# Altium PCB PCB2.PcbDoc
Units mil, origin at the board's own origin, x right, y up, seen from the top; angles counter-clockwise.
Board outline 4346 x 3642 mil, 2 copper layers (Top Layer, Bottom Layer); 40 components, 39 nets, 320 pads, 20 vias.
Unrouted connection lines stored in the file: 1.
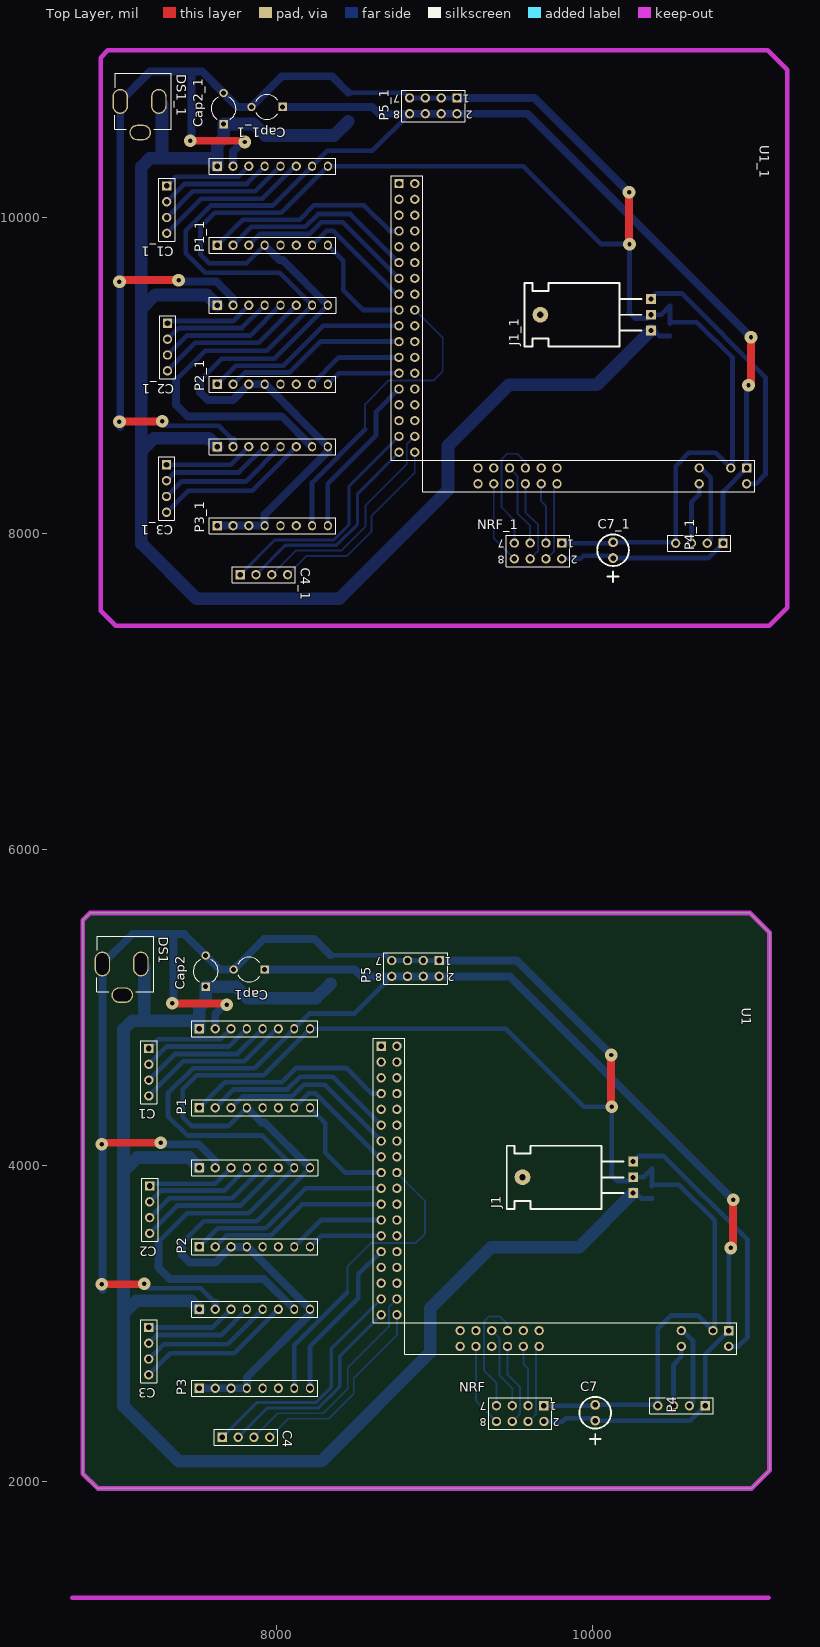
[diagram p0: Top Layer view]
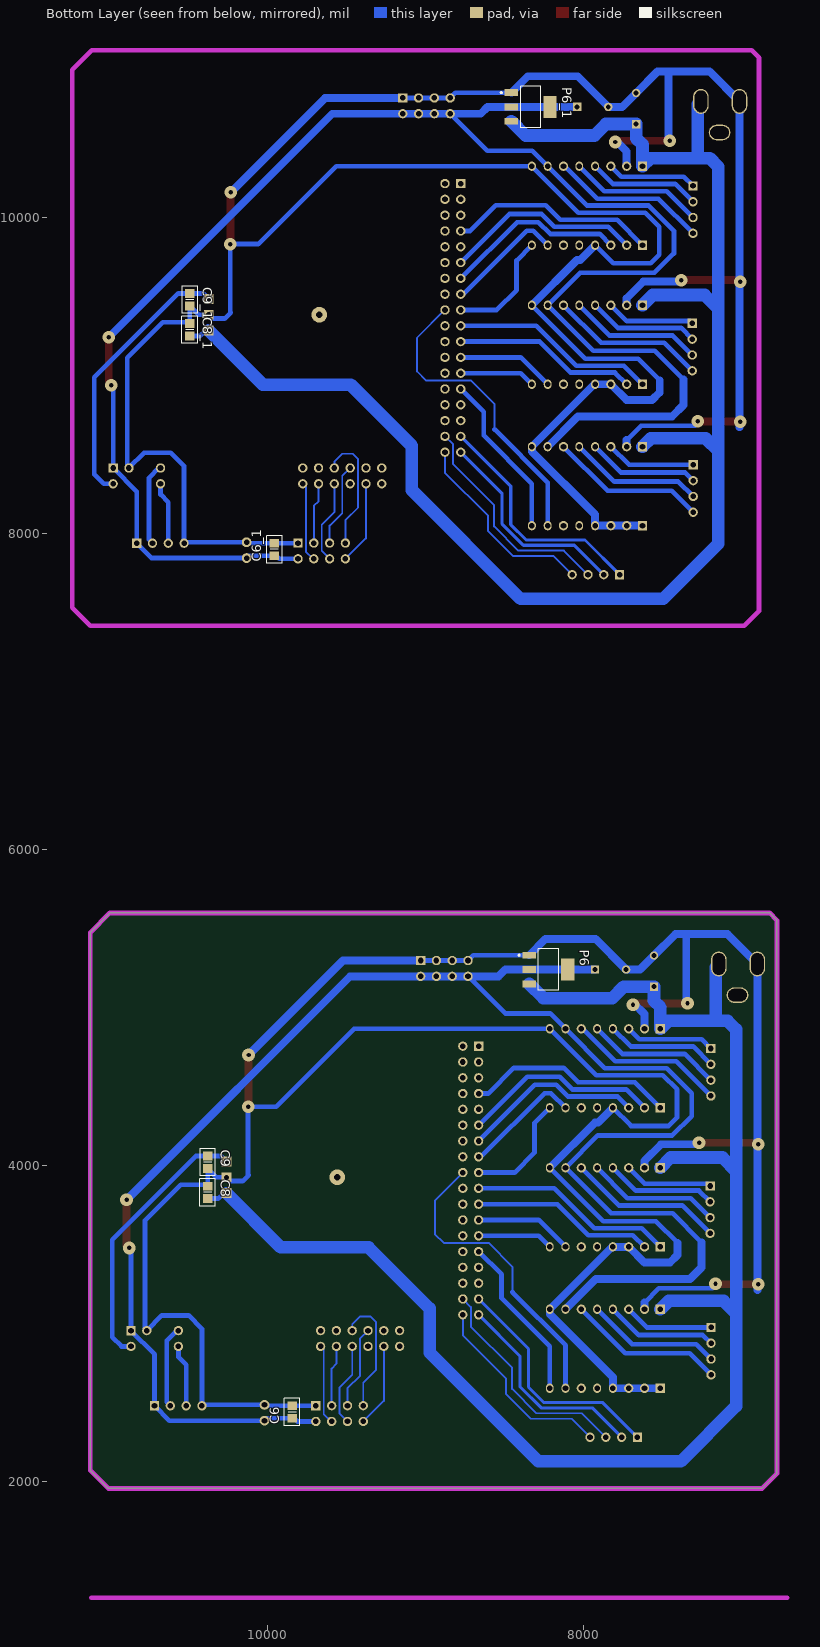
[diagram p1: Bottom Layer view, seen from below]

## Layer stack, top to bottom
Top Solder: solder mask 0.4, Solder Resist, Dk 3.5
Top Layer: signal copper 1.4
Dielectric 1: dielectric 12.6, FR-4, Dk 4.8
Bottom Layer: signal copper 1.4
Bottom Solder: solder mask 0.4, Solder Resist, Dk 3.5

## Board outline
6777,2050 6777,5552 6823,5598 10999,5598 11123,5474 11123,2070 11009,1956 6871,1956

## Design rules (kind name [scope] priority, off if disabled: settings)
Clearance [All] p1: gap=10
PolygonConnect [All] p1: connectstyle=Relief reliefconductorwidth=10 reliefentries=4 polygonreliefangle="90 Angle" airgapwidth=10
RoutingVias [All] p1: holewidth=28 width=50 viastyle="Through Hole" minholewidth=28 minwidth=50 maxholewidth=28 maxwidth=50
SolderMaskExpansion [All] p1: expansion=4
Width [All] p1: maxlimit=100 minlimit=10 preferedwidth=20
30 further rules are at their usual default settings.

## Classes and differential pairs
component class Sheet2: C1 C2 C3 C4 C6 C7 C8 C9 Cap1 Cap2 DS1 J1 NRF P1 P2 P3 P4 P5 P6 U1

## Components (designator, comment, footprint, x,y, rotation, side; value= is the part's Value field where it differs from the comment)
C1 "Header 4" HDR1X4 7195,4740 r270 top
C1_1 "Header 4" HDR1X4 7308,10199 r270 top (schematic designator C1)
C2 "Header 4" HDR1X4 7200,3870 r270 top
C2_1 "Header 4" HDR1X4 7313,9329 r270 top (schematic designator C2)
C3 "Header 4" HDR1X4 7194,2975 r270 top
C3_1 "Header 4" HDR1X4 7307,8434 r270 top (schematic designator C3)
C4 "Header 4" HDR1X4 7660,2280 r0 top
C4_1 "Header 4" HDR1X4 7773,7739 r0 top (schematic designator C4)
C6 "Cap" 0805_C 9845,2439.37 r90 bottom
C6_1 "Cap" 0805_C 9958,7898.37 r90 bottom (schematic designator C6)
C7 "Cap" 10UF 10020,2385 r90 top
C7_1 "Cap" 10UF 10133,7844 r90 top (schematic designator C7)
C8 "Cap" 0805_C 10380,3830 r270 bottom
C8_1 "Cap" 0805_C 10493,9289 r270 bottom (schematic designator C8)
C9 "Cap" 0805_C 10380,4020 r270 bottom
C9_1 "Cap" 0805_C 10493,9479 r270 bottom (schematic designator C9)
Cap1 "Cap2" CAPR5-4X5 7830,5240 r180 top
Cap1_1 "Cap2" CAPR5-4X5 7943,10699 r180 top (schematic designator Cap1)
Cap2 "Cap2" CAPR5-4X5 7555,5230 r90 top
Cap2_1 "Cap2" CAPR5-4X5 7668,10689 r90 top (schematic designator Cap2)
DS1 "BATTERY" 9V 7145.28,5275 r270 top
DS1_1 "BATTERY" 9V 7258.28,10734 r270 top (schematic designator DS1)
J1 "7805" TO-220 10260,3825 r90 top
J1_1 "7805" TO-220 10373,9284 r90 top (schematic designator J1)
NRF "Header 4X2" HDR2X4#1 9816,3220 r90 top
NRF_1 "Header 4X2" HDR2X4#1 9929,8679 r90 top (schematic designator NRF)
P1 "Header 8X2A" PCBComponent_1#1 11149,4151 r90 top
P1_1 "Header 8X2A" PCBComponent_1#1 11262,9610 r90 top (schematic designator P1)
P2 "Header 8X2A" PCBComponent_1#1 11149,3271 r90 top
P2_1 "Header 8X2A" PCBComponent_1#1 11262,8730 r90 top (schematic designator P2)
P3 "Header 8X2A" PCBComponent_1#1 11149,2376 r90 top
P3_1 "Header 8X2A" PCBComponent_1#1 11262,7835 r90 top (schematic designator P3)
P4 "Header 4" HDR1X4 10716,2479 r180 top
P4_1 "Header 4" HDR1X4 10829,7938 r180 top (schematic designator P4)
P5 "Header 4X2" HDR2X4#2 9032,5297 r180 top
P5_1 "Header 4X2" HDR2X4#2 9145,10756 r180 top (schematic designator P5)
P6 "Header 4" SOT-223 8222.5,5240 r270 bottom
P6_1 "Header 4" SOT-223 8335.5,10699 r270 bottom (schematic designator P6)
U1 "ZET6_3R" PCBComponent_1#2 8600,4975 r270 top
U1_1 "ZET6_3R" PCBComponent_1#2 8713,10434 r270 top (schematic designator U1)

## Footprints (in the part's own frame and the unit in brackets; to place one, negate y for a bottom-side part, rotate by r counter-clockwise, add the part's x,y. Pads: shape width x height; smd on the part's side, far side on the other; paste and mask are expansions set on the pad)
9V [mm]
  oval 4x2.5 hole 2 slot 3.5 at 0 deg: 1(0,-6.207) 2(0,-0.007)
  oval 2.5x3.5 hole 2 slot 3 at 90 deg: 3(5,-3.007)
  silkscreen extent -4.5,-7.11 4.5,2.03, body extent -4.38,-13.84 5.14,0.76, height 10.92
10UF [mil]
  round 62 hole 35.43: 1(0,0) 2(100,0)
  silkscreen extent -152,-100 150,100
0805_C [mm] "Chip Res or Cap, Body 2.0x1.2mm, IPC Low Density"
  rect 1.4x1.5 smd: 1(-1,0) 2(1,0)
  silkscreen extent -2.2,-1.25 2.2,1.25, body extent -1.07,-0.7 1.07,0.7, height 0.7
CAPR5-4X5 [mm] "Capacitor; 2 Leads"
  rect 1.35x1.35 hole 0.8: 1(-2.5,0)
  round 1.35 hole 0.8: 2(2.5,0)
  silkscreen extent -1.69,-2 1.82,2
HDR1X4 [mm] "Connector; Header; 4 Position"
  rect 1.5x1.5 hole 0.9: 1(0,0)
  round 1.5 hole 0.9: 2(2.54,0) 3(5.08,0) 4(7.62,0)
  silkscreen extent -1.27,-1.27 8.89,1.27
HDR2X4#1 [mm] "Connector; Header; 4x2 Position"
  rect 1.5x1.5 hole 0.9: 1(-18.796,3.073)
  round 1.5 hole 0.9: 2(-21.336,3.073) 3(-18.796,5.613) 4(-21.336,5.613) 5(-18.796,8.153) 6(-21.336,8.153) 7(-18.796,10.693) 8(-21.336,10.693)
  silkscreen extent -22.61,1.8 -17.53,11.96, body extent -45.82,1.54 -17.37,16.9, height 0.05
HDR2X4#2 [mm] "Connector; Header; 4x2 Position"
  rect 1.5x1.5 hole 0.9: 1(0,0)
  round 1.5 hole 0.9: 2(0,2.54) 3(2.54,0) 4(2.54,2.54) 5(5.08,0) 6(5.08,2.54) 7(7.62,0) 8(7.62,2.54)
  silkscreen extent -1.27,-1.27 8.89,3.81
PCBComponent_1#1 [mm]
  rect 1.5x1.5 hole 0.9: 1(5.436,92.304) 9(18.136,92.304)
  round 1.5 hole 0.9: 2(5.436,89.764) 3(5.436,87.224) 6(5.436,79.604) 10(18.136,89.764) 11(18.136,87.224) 14(18.136,79.604)
  oval 1.5x1.27 hole 0.9: 4(5.436,84.684) 5(5.436,82.144) 7(5.436,77.064) 8(5.436,74.524) 12(18.136,84.684) 13(18.136,82.144) 15(18.136,77.064) 16(18.136,74.524)
  silkscreen extent 4.17,73.25 19.41,93.57, body extent 4.17,73.25 19.28,93.57, height 0.7
PCBComponent_1#2 [mm]
  round 1.5 hole 0.9: 43(5.588,4.191) 45(8.128,4.191) 46(8.128,1.651) 47(10.668,4.191) 48(10.668,1.651) 49(13.208,4.191) 50(13.208,1.651) 51(15.748,4.191) 52(15.748,1.651) 53(18.288,4.191) 54(18.288,1.651) 55(20.828,4.191) 56(20.828,1.651) 57(23.368,4.191) 58(23.368,1.651) 59(25.908,4.191) 60(25.908,1.651) 61(28.448,4.191) 62(28.448,1.651) 63(30.988,4.191) 64(30.988,1.651) 65(33.528,4.191) 66(33.528,1.651) 67(36.068,4.191) 68(36.068,1.651) 69(38.608,4.191) 70(38.608,1.651) 71(41.148,4.191) 72(41.148,1.651) 73(43.688,4.191) 74(43.688,1.651) 75(46.228,4.191) 76(46.228,1.651) 77(48.768,4.191) 78(48.768,1.651) 85(53.848,14.351) 86(51.308,14.351) 87(53.848,16.891) 88(51.308,16.891) 89(53.848,19.431) 90(51.308,19.431) 91(53.848,21.971) 92(51.308,21.971) 93(53.848,24.511) 94(51.308,24.511) 95(53.848,27.051) 96(51.308,27.051) 113(53.848,49.911) 114(51.308,49.911) 118(51.308,54.991) 119(53.848,57.531)
  rect 1.5x1.5 hole 0.9: 44(5.588,1.651) 120(51.308,57.531)
  silkscreen extent 4.32,0.38 55.12,58.8
SOT-223 [mm] "SOT-223/SC-73; 4 Leads; Body 6.7 x 7.3 mm, inc. leads (LxW max)"
  rect 1.1x2.15 smd: 1(-2.3,-3.1) 2(0,-3.1) 3(2.3,-3.1)
  rect 3.5x2.15 smd: 4(0,3.1)
  silkscreen extent -3.35,-4.85 3.35,1.63, body extent -3.25,-3.58 3.25,3.38, height 1.65
TO-220 [mil]
  round 100 hole 40: 0(100,700)
  rect 62x62 hole 32: 1(0,0) 2(100,0) 3(200,0)
  silkscreen extent -100,60 300,800, body extent -99,-3 295,773, height 177

## Part data
C1 C1_1 C2 C2_1 C3 C3_1 C4 C4_1 P4 P4_1 P6 P6_1: "Header, 4-Pin"
C6 C6_1 C7 C7_1 C8 C8_1 C9 C9_1 Cap1 Cap1_1 Cap2 Cap2_1: "Capacitor"
J1 J1_1: library part CON3, "Connector"
NRF NRF_1 P5 P5_1: "Header, 4-Pin, Dual row"
P1 P1_1 P2 P2_1 P3 P3_1: "Header, 8-Pin, Dual row"

## Via types
v1: diameter 80, hole 28, Top Layer to Bottom Layer, 20 vias

## Nets (pads, with @x,y where several pads share a name; then routed paths per layer and width w, separated by ;. In a path a pad name is that pad's centre, name@x,y a point inside that pad or via, vN(x,y) a via of type N, cw(c..) or ccw(c..) an arc to the next point about the centre after c; other vN are vias at no path point)
3V3: C6.1 C7.1 Cap1.1 NRF.2 P1.15 P2.15 P3.15 P4.1 P5.2 P5.4 P5.6 P5.8 P6.2 P6.4 U1.120 | length 10999.1
  Top Layer w50: v1(10877,3478) 10893,3494 v1(10893,3782)
  Bottom Layer w10: C6.1@9833,2400 C6.1
  Bottom Layer w30: 7255,3514 7438,3697 7827,3697 P2.15 7910,4190 7439,4190 7316,4313 7316,4457 7475,4616 7866,4616 P1.15 8212,4962 8497,4962 P5.8 ; NRF.2 9813,2380 C6.1@9833,2400 ; C6.1 10005,2400 C7.1 10622,2385 P4.1 10716,2806 U1.120 v1@10865,3477
  Bottom Layer w50: 7255,3514 7255,3354 7327,3282 7923,3282 P3.15 ; Cap1.1 P6.4 P6.2 8496,5240 8539,5197 P5.8 P5.6 P5.4 P5.2 9478,5197 v1(10893,3782)
5V: C9.1 J1.3 U1.119 | length 1716.4
  Bottom Layer w30: J1.3 10294.37,4059.37 C9.1 10453.63,4059.37 10984,3529 10984,2914 10925,2855 U1.119
12V: C8.2 Cap2.1 DS1.2 J1.1 P1.9 P2.9 P3.9 P6.3 | length 9865.2
  Bottom Layer w30: J1.1 10279,3825 10313.37,3790.63 C8.2
  Bottom Layer w80: DS1.2 7165,5255 7165,4915 ; P3.9 7462,3143 7115,3143 7035,3063 ; P2.9 7450,4050 7122,4050 7035,3963 ; P6.3 8254.1,5059 7819,5059 7746.43,5131.57 Cap2.1 7555,5042 7515,5002 P1.9 7465,4915 7165,4915 ; J1.1 9917,3482 9361,3482 8975,3096 8975,2816 8286,2127 7385,2127 7035,2477 7035,3063 ; 7035,3063 7035,3963 ; 7035,3963 7035,4861 7089,4915 7165,4915
DIRX: P1.8 U1.60 | length 730
  Bottom Layer w30: P1.8 8312,4268 8312,4080 8437,3955 U1.60
DIRY: P2.8 U1.68 | length 479
  Bottom Layer w30: P2.8 8285,3555 U1.68
DIRZ: P3.8 U1.70 | length 1051.4
  Bottom Layer w30: P3.8 8215,2856 8520,3161 8520,3310 U1.70
ENDPOSX: C4.2 U1.78 | length 1339.1
  Bottom Layer w20: C4.2 7946,2466 8269,2466 8403,2600 8403,2793 U1.78
ENDPOSY: C4.4 U1.77 | length 1259
  Bottom Layer w12: C4.4 8077,2397 8334,2397 8492,2555 8492,2652 8765,2925 U1.77
GND: C6.2 C7.2 C8.1 C9.2 Cap1.2 Cap2.2 DS1.1 J1.2 NRF.1 P1.4 P1.10 P1.16 P2.3 P2.4 P2.10 P2.16 P3.1 P3.2 P3.3 P3.4 P3.10 P3.16 P4.4 P5.1 P5.3 P5.5 P5.7 P6.1 U1.118 | length 18607.3
  Top Layer w50: v1(6896,3248) 7163,3248 v1(7166,3251) ; v1(6896,4134) 6906,4144 v1(7270,4144) ; v1(7343,5026) 7680,5026 v1(7688,5018) ; v1(10121,4699) 10121,4375 v1(10124,4372)
  Bottom Layer w30: v1@7169,3237 7183,3223 7524,3223 7615,3132 ; 7406,3510 7543,3647 7877,3647 P2.16 ; Cap1.2 Cap1.2@7731.57,5240.57 ; P1.4 7700,4250 7463,4250 7409,4304 7409,4481 7499,4571 7921,4571 P1.16 9453,4865 9946,4372 v1(10124,4372) 10124,3942 10121,3939 10159,3901 10236,3901 J1.2 10324.37,3925 C9.2 C8.1 ; P6.1 8698.45,5330.55 P5.7 P5.5 P5.3 P5.1 ; NRF.1 9696.26,2478.74 C6.2 10013.74,2478.74 C7.2 10410,2485 P4.4 10416,2967 10500,3051 10669,3051 U1.118
  Bottom Layer w50: v1@6900.91,3212.91 DS1.1 7089.91,5464 7351,5464 ; v1@7280,4134 7510,4134 7615,4029 P2.10 ; v1@7351,5026 7351,5464 ; 7406,3510 7406,3434 7455,3385 7615,3385 P2.3 P2.4 7820,3485 P3.16 8215,3060 7815,2660 P3.4 P3.1 ; P3.10 7615,3132 ; P1.10 7615,4958 v1@7683,5026 ; Cap1.2 7643.43,5240 Cap2.2 7419.43,5464 7351,5464 ; Cap1.2@7731.57,5240.57 7925,5434 8241.1,5434 P6.1 ; P1.4 7909,4271 7929,4271 P2.16 ; P5.1 9523,5297 v1(10121,4699)
NetC1_1: C1.1 P1.11 | length 571.8
  Bottom Layer w30: C1.1 7253,4798 7648,4798 P1.11
NetC1_2: C1.2 P1.12 | length 713.2
  Bottom Layer w30: C1.2 7308,4753 7703,4753 P1.12
NetC1_3: C1.3 P1.13 | length 854.6
  Bottom Layer w30: C1.3 7361,4706 7756,4706 P1.13
NetC1_4: C1.4 P1.14 | length 996
  Bottom Layer w30: C1.4 7414,4659 7800,4659 8006,4865 P1.14
NetC2_1: C2.1 P2.11 | length 562.6
  Bottom Layer w30: C2.1 7215,3885 7615,3885 P2.11
NetC2_2: C2.2 P2.12 | length 704.1
  Bottom Layer w30: C2.2 7271,3841 7671,3841 P2.12
NetC2_3: C2.3 P2.13 | length 845.5
  Bottom Layer w30: C2.3 7323,3793 7723,3793 P2.13
NetC2_4: C2.4 P2.14 | length 986.9
  Bottom Layer w30: C2.4 7377,3747 7777,3747 P2.14
NetC3_1: C3.1 P3.11 | length 568.6
  Bottom Layer w30: C3.1 7600,2975 P3.11
NetC3_2: C3.2 P3.12 | length 710.1
  Bottom Layer w30: C3.2 7246,2927 7652,2927 P3.12
NetC3_3: C3.3 P3.13 | length 851.5
  Bottom Layer w30: C3.3 7288,2869 7694,2869 P3.13
NetC3_4: C3.4 P3.14 | length 992.9
  Bottom Layer w30: C3.4 7330,2811 7736,2811 P3.14
NRF_CE: NRF.3 U1.93 | length 387.4
  Bottom Layer w12: U1.93 9565,2745 9595,2715 NRF.3
NRF_CSN: NRF.4 U1.95 | length 506.9
  Bottom Layer w12: NRF.4 9600,2380 9645,2425 9645,2835 U1.95
NRF_IRQ: NRF.8 U1.87 | length 528.8
  Bottom Layer w12: U1.87 9265,2510 NRF.8
NRF_MISO: NRF.7 U1.92 | length 788.3
  Bottom Layer w12: NRF.7 9395,2625 9315,2705 9315,3010 9350,3045 9415,3045 9465,2995 U1.92
NRF_MOSI: NRF.6 U1.91 | length 528.8
  Bottom Layer w12: U1.91 9465,2675 9545,2595 9545,2430 NRF.6
NRF_SCK: NRF.5 U1.90 | length 528.8
  Bottom Layer w12: U1.90 9415,2905 9415,2670 9495,2590 NRF.5
RX: P4.2 U1.114 | length 521.2
  Bottom Layer w12: U1.114 U1.114@10575,2955
  Bottom Layer w30: U1.114@10575,2955 10638,2892 10638,2501 P4.2
STARTPOSX: C4.1 U1.76 | length 1509.2
  Bottom Layer w20: C4.1 7879,2499 8251,2499 8349,2597 8349,2839 U1.76
STARTPOSY: C4.3 U1.75 | length 1418.6
  Bottom Layer w12: C4.3 8012,2432 8300,2432 8453.5,2585.5 8453.5,2718.5 8714,2979 8714,3104 U1.75
STEPX: P1.7 U1.58 | length 754.6
  Bottom Layer w30: P1.7 8207,4457 8248,4457 8650,4055 U1.58
STEPY: P2.7 U1.66 | length 620.4
  Bottom Layer w30: P2.7 8285,3655 U1.66
STEPZ: P3.7 U1.59 | length 1947.2
  Bottom Layer w12: 8451,3199 8451,3359 8601.47,3509.47 8885.47,3509.47 8942,3566 8942,3778 U1.59
  Bottom Layer w30: P3.7 8115,2863 8451,3199
TX: P4.3 U1.113 | length 396.3
  Bottom Layer w30: P4.3 10516,2739 10565,2788 U1.113
X_EN: P1.1 U1.50 | length 1321.5
  Bottom Layer w30: P1.1 7676,4526 8036,4526 8127,4617 8443,4617 8605,4455 U1.50
XSET0: P1.2 U1.54 | length 1258.8
  Bottom Layer w30: P1.2 7731,4481 8072,4481 8153,4562 8358,4562 U1.54
XSET1: P1.3 U1.56 | length 1157.9
  Bottom Layer w30: P1.3 7786,4436 8099,4436 8174,4511 8309,4511 U1.56
Y_EN: P2.1 U1.62 | length 1303.3
  Bottom Layer w30: P2.1 7632,3602 7934,3602 8187,3855 U1.62
YSET0: P2.2 U1.64 | length 1161.8
  Bottom Layer w30: P2.2 7689,3559 7970,3559 8166,3755 U1.64
pads on no net: C1_1.1 C1_1.2 C1_1.3 C1_1.4 C2_1.1 C2_1.2 C2_1.3 C2_1.4 C3_1.1 C3_1.2 C3_1.3 C3_1.4 C4_1.1 C4_1.2 C4_1.3 C4_1.4 C6_1.1 C6_1.2 C7_1.1 C7_1.2 C8_1.1 C8_1.2 C9_1.1 C9_1.2 Cap1_1.1 Cap1_1.2 Cap2_1.1 Cap2_1.2 DS1.3 DS1_1.1 DS1_1.2 DS1_1.3 J1.0 J1_1.0 J1_1.1 J1_1.2 J1_1.3 NRF_1.1 NRF_1.2 NRF_1.3 NRF_1.4 NRF_1.5 NRF_1.6 NRF_1.7 NRF_1.8 P1.5 P1.6 P1_1.1 P1_1.2 P1_1.3 P1_1.4 P1_1.5 P1_1.6 P1_1.7 P1_1.8 P1_1.9 P1_1.10 P1_1.11 P1_1.12 P1_1.13 P1_1.14 P1_1.15 P1_1.16 P2.5 P2.6 P2_1.1 P2_1.2 P2_1.3 P2_1.4 P2_1.5 P2_1.6 P2_1.7 P2_1.8 P2_1.9 P2_1.10 P2_1.11 P2_1.12 P2_1.13 P2_1.14 P2_1.15 P2_1.16 P3.5 P3.6 P3_1.1 P3_1.2 P3_1.3 P3_1.4 P3_1.5 P3_1.6 P3_1.7 P3_1.8 P3_1.9 P3_1.10 P3_1.11 P3_1.12 P3_1.13 P3_1.14 P3_1.15 P3_1.16 P4_1.1 P4_1.2 P4_1.3 P4_1.4 P5_1.1 P5_1.2 P5_1.3 P5_1.4 P5_1.5 P5_1.6 P5_1.7 P5_1.8 P6_1.1 P6_1.2 P6_1.3 P6_1.4 U1.43 U1.44 U1.45 U1.46 U1.47 U1.48 U1.49 U1.51 U1.52 U1.53 U1.55 U1.57 U1.61 U1.63 U1.65 U1.67 U1.69 U1.71 U1.72 U1.73 U1.74 U1.85 U1.86 U1.88 U1.89 U1.94 U1.96 U1_1.43 U1_1.44 U1_1.45 U1_1.46 U1_1.47 U1_1.48 U1_1.49 U1_1.50 U1_1.51 U1_1.52 U1_1.53 U1_1.54 U1_1.55 U1_1.56 U1_1.57 U1_1.58 U1_1.59 U1_1.60 U1_1.61 U1_1.62 U1_1.63 U1_1.64 U1_1.65 U1_1.66 U1_1.67 U1_1.68 U1_1.69 U1_1.70 U1_1.71 U1_1.72 U1_1.73 U1_1.74 U1_1.75 U1_1.76 U1_1.77 U1_1.78 U1_1.85 U1_1.86 U1_1.87 U1_1.88 U1_1.89 U1_1.90 U1_1.91 U1_1.92 U1_1.93 U1_1.94 U1_1.95 U1_1.96 U1_1.113 U1_1.114 U1_1.118 U1_1.119 U1_1.120
copper on no net: | length 74383.4
  Top Layer w50: v1(7009,8707) 7276,8707 v1(7279,8710) ; v1(7009,9593) 7019,9603 v1(7383,9603) ; v1(7456,10485) 7793,10485 v1(7801,10477) ; v1(10234,10158) 10234,9834 v1(10237,9831) ; v1(10990,8937) 11006,8953 v1(11006,9241)
  Bottom Layer w10: 9946,7859 9958,7859
  Bottom Layer w12: 7973,7739 8125,7891 8413,7891 8566.5,8044.5 8566.5,8177.5 8827,8438 8827,8563 8878,8614 ; 8073,7739 8190,7856 8447,7856 8605,8014 8605,8111 8878,8384 8878,8514 ; 8564,8658 8564,8818 8714.47,8968.47 8998.47,8968.47 9055,9025 9055,9237 8878,9414 ; 9378,8314 9378,7969 9508,7839 ; 9478,8414 9528,8364 9528,8129 9608,8049 9608,7939 ; 9508,7939 9508,8084 9428,8164 9428,8469 9463,8504 9528,8504 9578,8454 9578,8414 ; 9578,8314 9578,8134 9658,8054 9658,7889 9608,7839 ; 9678,8314 9678,8204 9708,8174 9708,7939 ; 9708,7839 9713,7839 9758,7884 9758,8294 9778,8314 ; 10678,8414 10688,8414
  Bottom Layer w20: 7773,7739 7992,7958 8364,7958 8462,8056 8462,8298 8778,8614 ; 7873,7739 8059,7925 8382,7925 8516,8059 8516,8252 8778,8514
  Bottom Layer w30: v1@7282,8696 7296,8682 7637,8682 7728,8591 ; 7307,8134 7443,8270 7849,8270 8128,8549 ; 7307,8234 7401,8328 7807,8328 8028,8549 ; 7307,8334 7359,8386 7765,8386 7928,8549 ; 7307,8434 7713,8434 7828,8549 ; 7308,9899 7527,10118 7913,10118 8119,10324 8128,10324 ; 7308,9999 7474,10165 7869,10165 8028,10324 ; 7308,10099 7421,10212 7816,10212 7928,10324 ; 7308,10199 7366,10257 7761,10257 7828,10324 ; 7313,9029 7490,9206 7890,9206 8128,9444 ; 7313,9129 7436,9252 7836,9252 8028,9444 ; 7313,9229 7384,9300 7784,9300 7928,9444 ; 7313,9329 7328,9344 7728,9344 7828,9444 ; 7368,8973 7551,9156 7940,9156 8228,9444 8023,9649 7552,9649 7429,9772 7429,9916 7588,10075 7979,10075 8228,10324 8325,10421 8610,10421 8845,10656 ; 7519,8969 7656,9106 7990,9106 8328,9444 ; 7628,8944 7745,9061 8047,9061 8300,9314 8778,9314 ; 7628,9824 7789,9985 8149,9985 8240,10076 8556,10076 8718,9914 8778,9914 ; 7728,8944 7802,9018 8083,9018 8279,9214 8778,9214 ; 7728,9824 7844,9940 8185,9940 8266,10021 8471,10021 8778,9714 ; 7828,9824 7899,9895 8212,9895 8287,9970 8422,9970 8778,9614 ; 7844.57,10699 7844.57,10699.57 ; 7928,9824 7813,9709 7576,9709 7522,9763 7522,9940 7612,10030 8034,10030 8328,10324 9566,10324 10059,9831 v1(10237,9831) 10237,9401 10234,9398 10272,9360 10349,9360 10373,9384 10437.37,9384 10493,9439.63 10493,9328.37 ; 8228,8049 8228,8322 8564,8658 ; 8228,8944 8398,9114 8778,9114 ; 8228,9824 8320,9916 8361,9916 8763,9514 8778,9514 ; 8328,8049 8328,8315 8633,8620 8633,8769 8778,8914 ; 8328,8944 8398,9014 8778,9014 ; 8328,9824 8425,9727 8425,9539 8550,9414 8778,9414 ; 8457.55,10789.55 8811.45,10789.55 8845,10756 8945,10756 9045,10756 9145,10756 ; 9808,7839 9926,7839 9946,7859 ; 9808,7939 9809.26,7937.74 9958,7937.74 10126.74,7937.74 10133,7944 10523,7944 10529,7938 10529,8426 10613,8510 10782,8510 10878,8414 ; 9958,7859 10118,7859 10133,7844 10735,7844 10829,7938 10829,8265 10978,8414 v1@10978,8936 ; 10373,9284 10392,9284 10426.37,9249.63 10493,9249.63 ; 10373,9484 10407.37,9518.37 10493,9518.37 10566.63,9518.37 11097,8988 11097,8373 11038,8314 10978,8314 ; 10386,3878 10550,3878 10776,3652 10776,3009 10776,2966 ; 10499,9337 10663,9337 10889,9111 10889,8468 10889,8425 ; 10629,7938 10629,8198 10678,8247 10678,8314 ; 10688,8414 10751,8351 10751,7960 10729,7938
  Bottom Layer w50: v1@7013.91,8671.91 7013.91,10734 7202.91,10923 7464,10923 ; 7368,8973 7368,8813 7440,8741 8036,8741 8228,8549 ; v1@7393,9593 7623,9593 7728,9488 7728,9444 ; v1@7464,10485 7464,10923 ; 7519,8969 7519,8893 7568,8844 7728,8844 7828,8944 7928,8944 7933,8944 8328,8549 8328,8519 7928,8119 7928,8049 7628,8049 ; 7728,8549 7728,8591 ; 7728,10324 7728,10417 v1@7796,10485 ; 7844.57,10699 7756.43,10699 7668,10787.43 7532.43,10923 7464,10923 ; 7844.57,10699.57 8038,10893 8354.1,10893 8457.55,10789.55 ; 7928,9824 8022,9730 8042,9730 8328,9444 ; 8041.43,10699 8213.46,10699 8457.55,10699 8609,10699 8652,10656 8845,10656 8945,10656 9045,10656 9145,10656 9591,10656 v1(11006,9241) ; 9145,10756 9636,10756 v1(10234,10158)
  Bottom Layer w80: 7258,10734 7278,10714 7278,10374 ; 7628,8549 7575,8602 7228,8602 7148,8522 ; 7628,9444 7563,9509 7235,9509 7148,9422 ; 8457.55,10608.45 8367.1,10518 7932,10518 7859.43,10590.57 7668,10590.57 7668,10501 7628,10461 7628,10324 7578,10374 7278,10374 ; 10373,9284 10030,8941 9474,8941 9088,8555 9088,8275 8399,7586 7498,7586 7148,7936 7148,8522 ; 7148,8522 7148,9422 ; 7148,9422 7148,10320 7202,10374 7278,10374

## Keep-outs
Keep-Out Layer:
  lines w30: 6711,1265 11117,1265 ; 6777,2050 6777,5552 6823,5598 9612,5598 10999,5598 11123,5474 11123,2070 11009,1956 6871,1956 6777,2050 ; 6890,7509 6984,7415 11122,7415 11236,7529 11236,10933 11112,11057 9725,11057 6936,11057 6890,11011 6890,7509

## Text inside footprints (layer, text, board x,y; h text height)
NRF: Top Overlay "8" at 9335,2400 h50 r180; Top Overlay "7" at 9335,2500 h50 r180; Top Overlay "1" at 9775,2500 h50 r180; Top Overlay "2" at 9795,2400 h50 r180
NRF_1: Top Overlay "8" at 9448,7859 h50 r180; Top Overlay "7" at 9448,7959 h50 r180; Top Overlay "1" at 9888,7959 h50 r180; Top Overlay "2" at 9908,7859 h50 r180
P5: Top Overlay "2" at 9132,5217 h50 r180; Top Overlay "1" at 9112,5317 h50 r180; Top Overlay "7" at 8672,5317 h50 r180; Top Overlay "8" at 8672,5217 h50 r180
P5_1: Top Overlay "2" at 9245,10676 h50 r180; Top Overlay "1" at 9225,10776 h50 r180; Top Overlay "7" at 8785,10776 h50 r180; Top Overlay "8" at 8785,10676 h50 r180